# EAGLE board OpenBook_PCB_v56 (EAGLE 9.7.0)
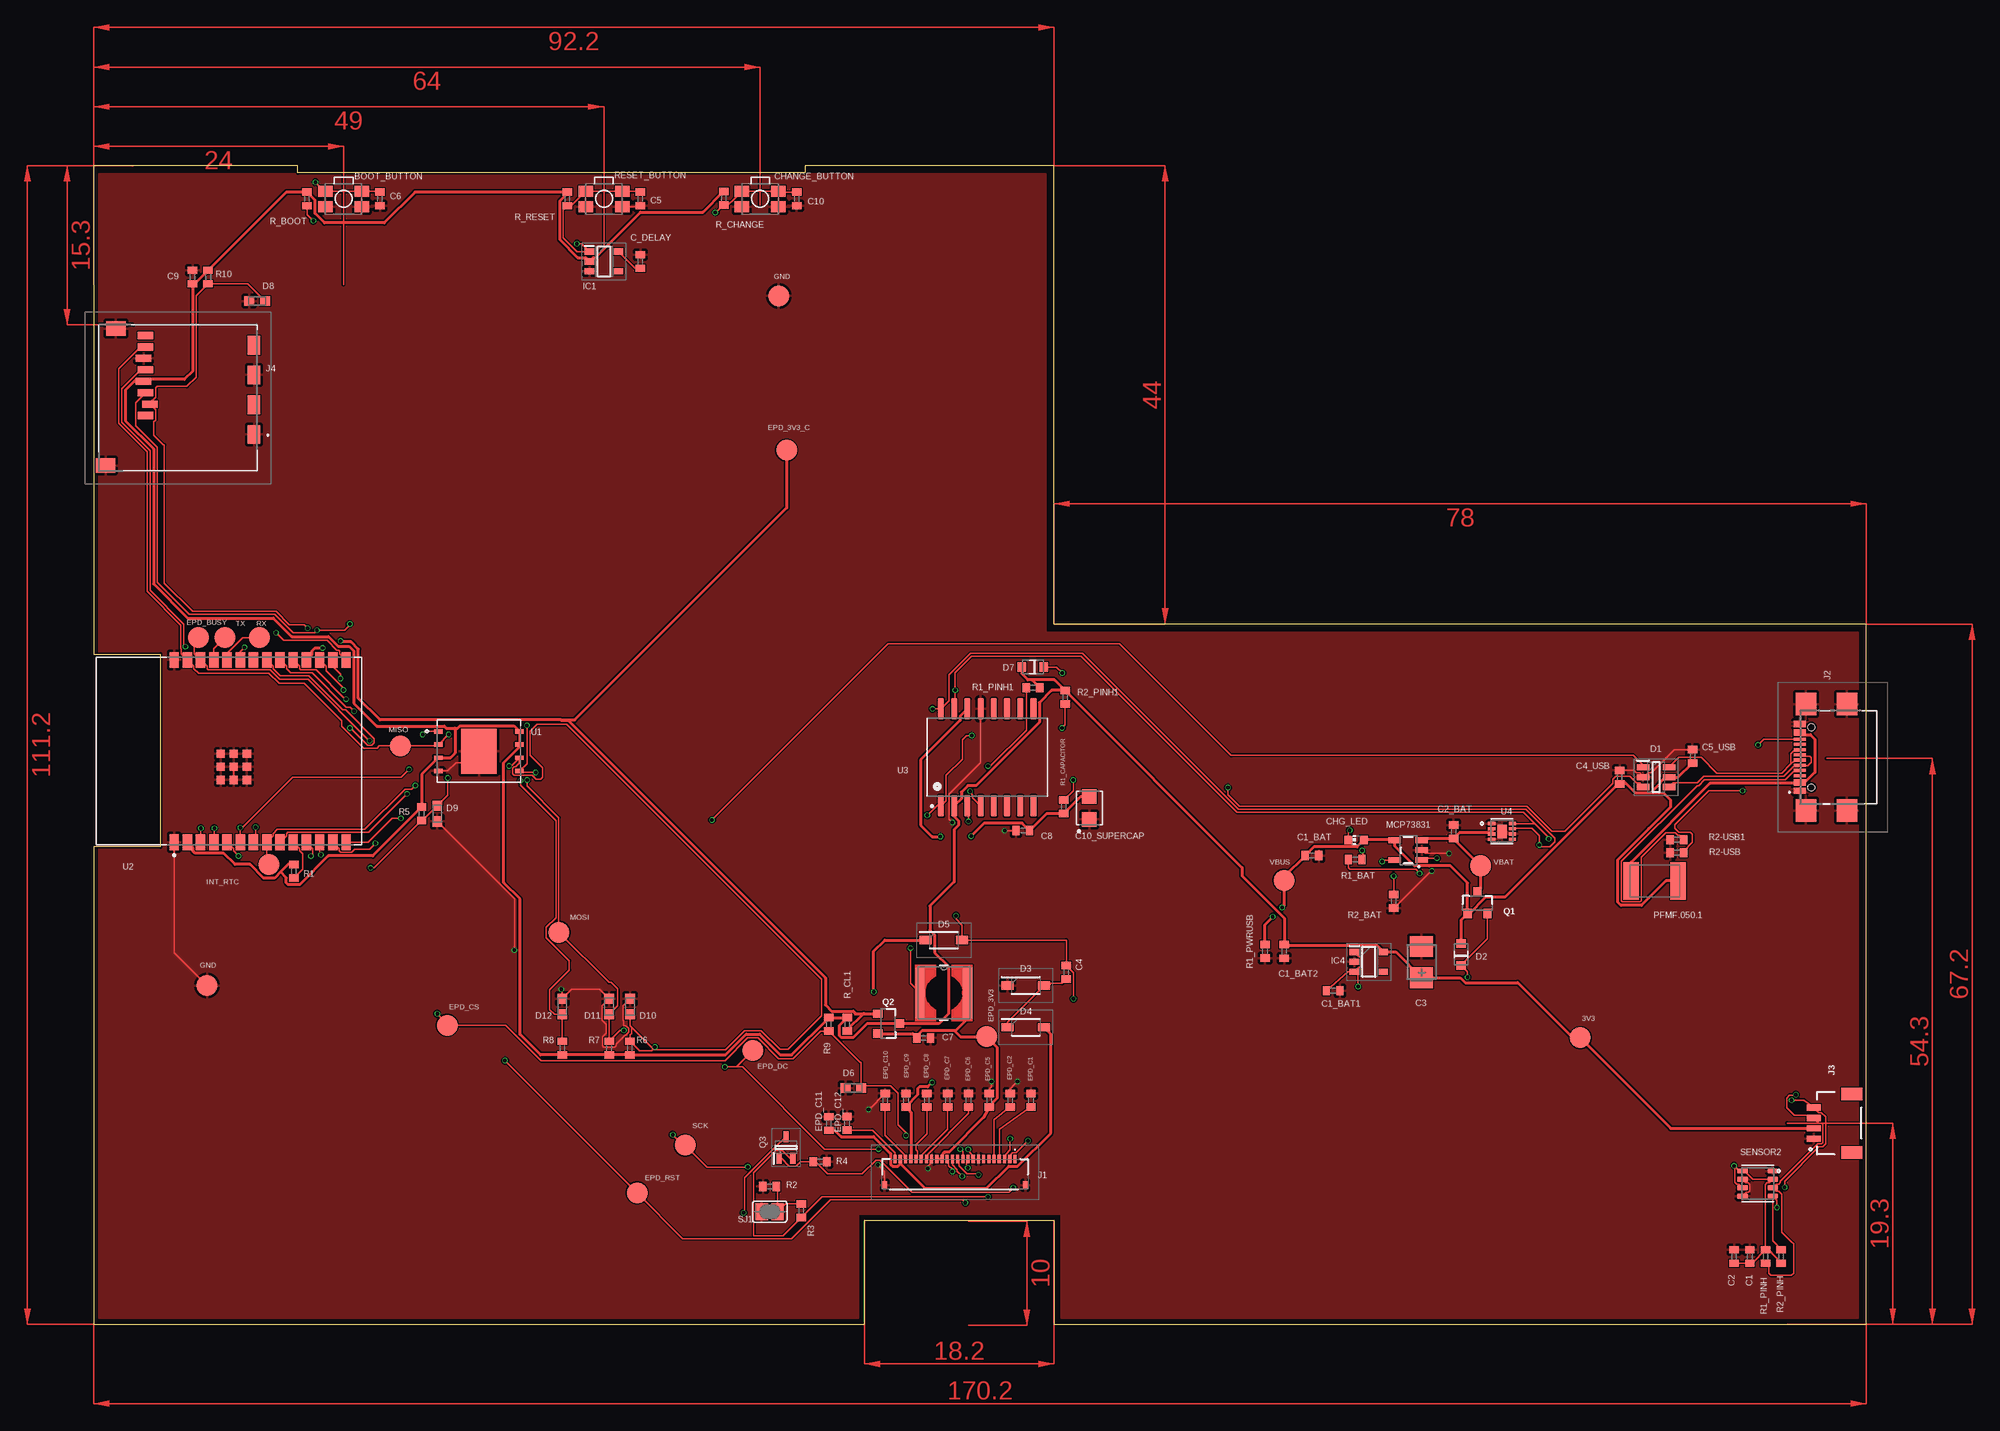
[diagram p0: board, top side]
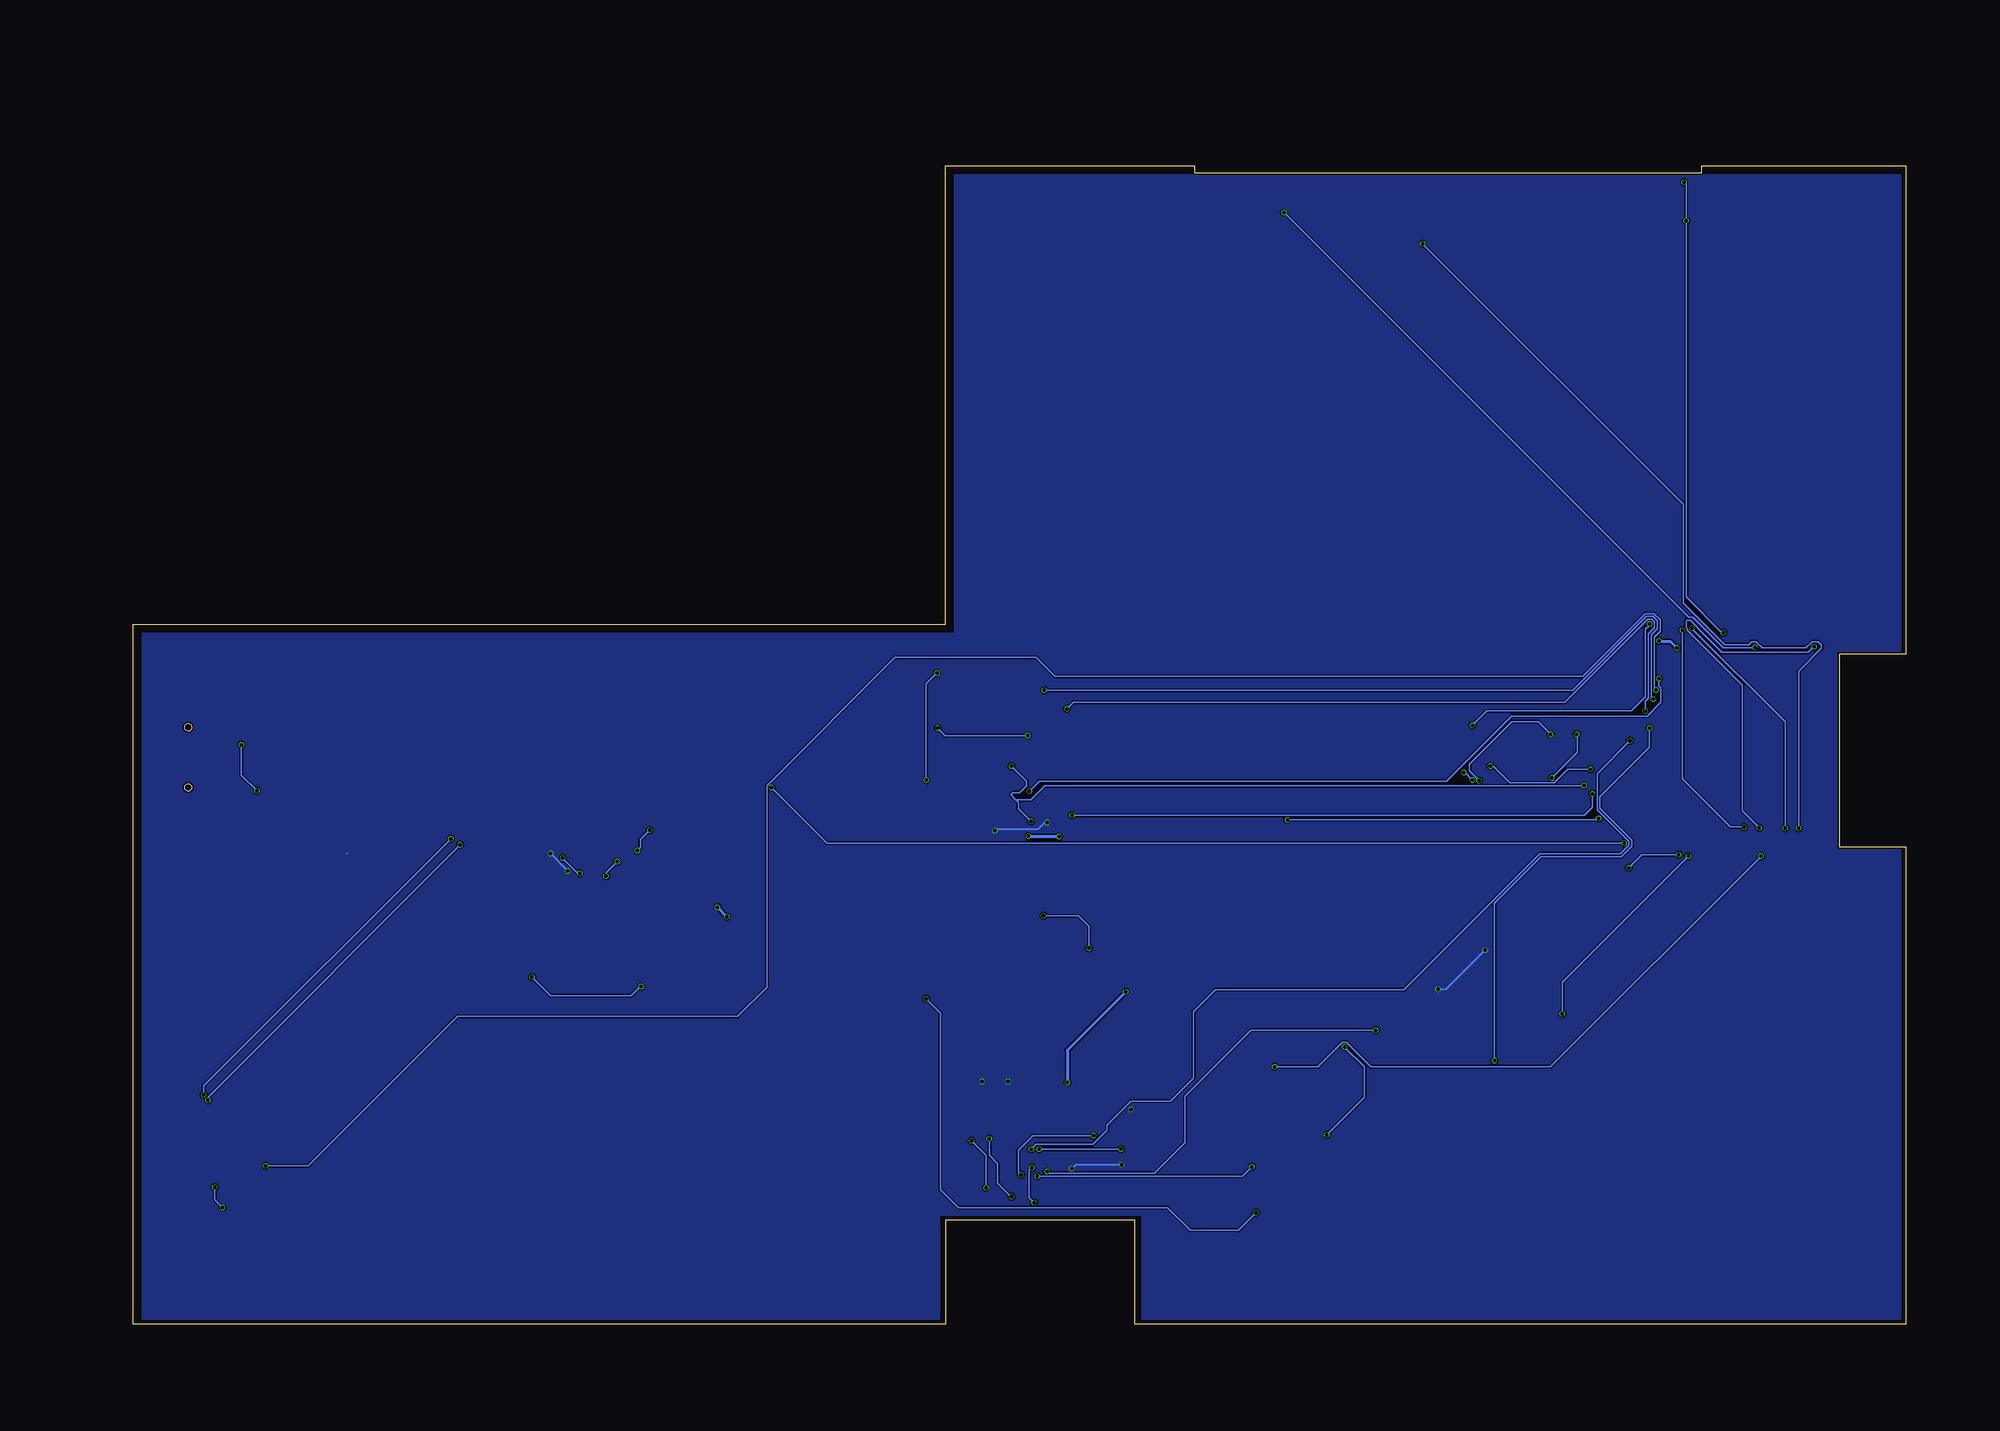
[diagram p1: board, bottom side, seen from below]

Size 170.2 x 111.2 mm. Coordinates in mm from the lower left corner, seen from the top.
Outline: 0,0 74,0 74,10 92.2,10 92.2,0 170.2,0 170.2,67.2 92.2,67.2 92.2,111.2 68.3,111.2 68.3,110.5 19.6,110.5 19.6,111.2 0,111.2 0,64.3 6.4,64.3 6.4,45.8 0,45.8 0,0
Copper layers (1*16): Top 0.035mm / dielectric 1.6mm / Bottom 0.035mm
Design rules "jlcpcb-2layers.dru *": minimum track width 5mil, minimum drill 0.3mm, track to track 5mil, track to pad 5mil, pad to pad 5mil, via to via 5mil, smd to smd 5mil, copper to edge 0.2mm, drill to drill 6mil, minimum pad ring 10mil, minimum via ring 3mil, stop-mask expansion 4mil, vias tented up to drill 0mil, thermal gap 10mil
Net classes: 0 default: width 0.15 mm; 1 power: width 0.3 mm

## Footprints (pad centres in the part's own frame; a part is rotated, then mirrored left to right if it is on the bottom)
MYBUTTON = smd 1.4 x 1.05: 1 1.75,0.75; 2 -1.75,0.75; 3 -1.75,-0.75; 4 1.75,-0.75
ESP32_WROVER_EAGLE-LTSPICE_C0402 = smd 0.7 x 0.9: 1 -0.65,0; 2 0.65,0
RCL_CT3528 = smd 2 x 2.2: + -1.5,0; - 1.5,0
CAPCP3225X100N = smd 1.4 x 1.4: 1 -1.1,0; 2 1.1,0
ADAFRUIT_CHIP-LED0603 = smd 0.8 x 0.8: A 0,-0.75; C 0,0.75
SOT95P280X145-6N = smd 1.2 x 0.6: 1 -1.25,0.95; 2 -1.25,0; 3 -1.25,-0.95; 4 1.25,-0.95; 5 1.25,0; 6 1.25,0.95
ESP32_WROVER_AVX---SD0805S020S1R0_AVX_SD0805S020S1R0_0 = smd 0.8 x 0.9: 1 -1.05,0; 2 1.05,0
SOD3716X135N = smd 1.15 x 0.8: 1 -1.75,0; 2 1.75,0
DIOC1608X36N = smd 0.97 x 0.94: 1 -0.75,0; 2 0.75,0
SOT95P280X125-5N = smd 0.9 x 0.6: 1 -1.4,0.95; 2 -1.4,0; 3 -1.4,-0.95; 4 1.4,-0.95; 5 1.4,0.95
SOT95P280X120-5N = smd 0.9 x 0.6: 1 -1.4,0.95; 2 -1.4,0; 3 -1.4,-0.95; 4 1.4,-0.95; 5 1.4,0.95
FH34SRJ24S05SH99 = smd 0.3 x 0.8: 1 5.75,1.45; 2 5.25,1.45; 3 4.75,1.45; 4 4.25,1.45; 5 3.75,1.45; 6 3.25,1.45; 7 2.75,1.45; 8 2.25,1.45; 9 1.75,1.45; 10 1.25,1.45; 11 0.75,1.45; 12 0.25,1.45; 13 -0.25,1.45; 14 -0.75,1.45; 15 -1.25,1.45; 16 -1.75,1.45; 17 -2.25,1.45; 18 -2.75,1.45; 19 -3.25,1.45; 20 -3.75,1.45; 21 -4.25,1.45; 22 -4.75,1.45; 23 -5.25,1.45; 24 -5.75,1.45 | smd 0.4 x 0.8: MP1 6.75,-1.05; MP2 -6.75,-1.05
SAMACSYS_PARTS_USB4110GFA = smd 0.3 x 1.15: A1 -3.35,3.678; A4 -2.55,3.678; A5 -1.25,3.678; A6 -0.25,3.678; A7 0.25,3.678; A8 1.25,3.678; A9 2.55,3.678; A12 3.35,3.678; B1 3.05,3.678; B4 2.25,3.678; B5 1.75,3.678; B6 0.75,3.678; B7 -0.75,3.678; B8 -1.75,3.678; B9 -2.25,3.678; B12 -3.05,3.678 | smd 2.18 x 2: MP1 -5.11,-0.827; MP2 5.11,-0.827; MP3 -5.11,3.103; MP4 5.11,3.103 | hole 0.65: -2.89,2.603; 2.89,2.603
JST04_1MM_RA = smd 0.6 x 1.35: 1 -1.5,0; 2 -0.5,0; 3 0.5,0; 4 1.5,0 | smd 1.2 x 2: NC1 2.8,-3.675; NC2 -2.8,-3.675
112ATAARR03ATTEND = smd 1.8 x 1.2: G1 10.6,10.4; G2 4.9,10.4; S1 7.75,10.4; S2 2.05,10.4 | smd 1.4 x 1.9: G3 13.6,-3.85; G4 0.45,-2.85 | smd 0.7 x 1.5: P1 8.8,0; P2 7.7,0.4; P3 6.6,0; P4 5.5,-0.2; P5 4.4,0; P6 3.3,-0.2; P7 2.2,0; P8 1.1,0
IND_4828-WE-TPC_WRE = smd 0.889 x 4.826: 1 -2.286,0; 2 2.286,0
ESP32_WROVER_SPARKFUN-IC-POWER_SOT23-5 = smd 0.55 x 1.2: 1 -0.95,-1.3; 2 0,-1.3; 3 0.95,-1.3; 4 0.95,1.3; 5 -0.95,1.3
ESP32C6_VARISTOR_CT/CN1812 = smd 1.5 x 3.6: 1 -2.25,0; 2 2.25,0
ESP32_WROVER_SPARKFUN-DISCRETESEMI_SOT23-3 = smd 0.8 x 0.9: 1 -0.95,-1; 2 0.95,-1; 3 0,1.1
SOT65P210X110-3N = smd 1.05 x 0.5: 1 -1.05,0.65; 2 -1.05,-0.65; 3 1.05,0
ESP32_WROVER_EAGLE-LTSPICE_R0402 = smd 0.7 x 0.9: 1 -0.65,0; 2 0.65,0
ESP32_WROVER_BME680_PSON80P300X300X100-8N = smd 1.016 x 0.5: 1 1.458,1.2; 2 1.458,0.4; 3 1.458,-0.4; 4 1.458,-1.2; 5 -1.458,-1.22; 6 -1.458,-0.4; 7 -1.458,0.4; 8 -1.458,1.2
SJ = smd 1.168 x 1.6: 1 -0.762,0; 2 0.762,0
TP20R = smd 2 x 2: TP 0,0
SON127P600X800X80-9N = smd 0.94 x 0.44: 1 -3.895,1.905; 2 -3.895,0.635; 3 -3.895,-0.635; 4 -3.895,-1.905; 5 3.895,-1.905; 6 3.895,-0.635; 7 3.895,0.635; 8 3.895,1.905 | smd 3.4 x 4.3: 9 0,0
XCVR_ESP32-C6-WROOM-1-N8 = smd 1.5 x 0.9: 1 -8.75,5.26; 2 -8.75,3.99; 3 -8.75,2.72; 4 -8.75,1.45; 5 -8.75,0.18; 6 -8.75,-1.09; 7 -8.75,-2.36; 8 -8.75,-3.63; 9 -8.75,-4.9; 10 -8.75,-6.17; 11 -8.75,-7.44; 12 -8.75,-8.71; 13 -8.75,-9.98; 14 -8.75,-11.25; 15 8.75,-11.25; 16 8.75,-9.98; 17 8.75,-8.71; 18 8.75,-7.44; 19 8.75,-6.17; 20 8.75,-4.9; 21 8.75,-3.63; 22 8.75,-2.36; 23 8.75,-1.09; 24 8.75,0.18; 25 8.75,1.45; 26 8.75,2.72; 27 8.75,3.99; 28 8.75,5.26 | smd 0.8 x 0.8: 29_1 -2.755,0.79; 29_2 -1.505,0.79; 29_3 -0.255,0.79; 29_4 -2.755,-0.46; 29_5 -1.505,-0.46; 29_6 -0.255,-0.46; 29_7 -2.755,-1.71; 29_8 -1.505,-1.71; 29_9 -0.255,-1.71
SOIC127P1032X265-16N = smd 2.05 x 0.59: 1 -4.655,4.445; 2 -4.655,3.175; 3 -4.655,1.905; 4 -4.655,0.635; 5 -4.655,-0.635; 6 -4.655,-1.905; 7 -4.655,-3.175; 8 -4.655,-4.445; 9 4.655,-4.445; 10 4.655,-3.175; 11 4.655,-1.905; 12 4.655,-0.635; 13 4.655,0.635; 14 4.655,1.905; 15 4.655,3.175; 16 4.655,4.445
SON50P200X200X80-9N = smd 0.76 x 0.27: 1 -0.985,0.75; 2 -0.985,0.25; 3 -0.985,-0.25; 4 -0.985,-0.75; 5 0.985,-0.75; 6 0.985,-0.25; 7 0.985,0.25; 8 0.985,0.75 | smd 0.9 x 1.3: 9 0,0

## Placement (x,y rotation side)
BOOT_BUTTON  BUTTON_CUSYOMV1  [MYBUTTON]  24,108 180 top
C1  100nF  [ESP32_WROVER_EAGLE-LTSPICE_C0402]  159,6.5 90 top
C1_BAT  4.7uF  [ESP32_WROVER_EAGLE-LTSPICE_C0402]  116.97,44.98 0 top
C1_BAT1  4.7uF  [ESP32_WROVER_EAGLE-LTSPICE_C0402]  119,32 0 top
C1_BAT2  4.7uF  [ESP32_WROVER_EAGLE-LTSPICE_C0402]  114.31,35.78 270 top
C2  100nF  [ESP32_WROVER_EAGLE-LTSPICE_C0402]  157.5,6.5 90 top
C2_BAT  4.7uF  [ESP32_WROVER_EAGLE-LTSPICE_C0402]  130.56,47.26 90 top
C3  100uF  [RCL_CT3528]  127.49,34.75 90 top
C4  4.7uF/25V  [ESP32_WROVER_EAGLE-LTSPICE_C0402]  93.38,33.78 90 top
C4_USB  100nF  [ESP32_WROVER_EAGLE-LTSPICE_C0402]  146.5,52.5 90 top
C5  1uF  [ESP32_WROVER_EAGLE-LTSPICE_C0402]  52.5,108 270 top
C5_USB  4.7uF  [ESP32_WROVER_EAGLE-LTSPICE_C0402]  153.5,54.5 90 top
C6  100nF  [ESP32_WROVER_EAGLE-LTSPICE_C0402]  27.5,108 270 top
C7  10uF  [ESP32_WROVER_EAGLE-LTSPICE_C0402]  79.69,27.48 0 top
C8  100nF  [ESP32_WROVER_EAGLE-LTSPICE_C0402]  89.21,47.37 180 top
C9  100nF  [ESP32_WROVER_EAGLE-LTSPICE_C0402]  9.5,100.5 90 top
C10  100nF  [ESP32_WROVER_EAGLE-LTSPICE_C0402]  67.5,108 270 top
C10_SUPERCAP  CPH3225A  [CAPCP3225X100N]  95.6,49.55 90 top
C_DELAY  100nF  [ESP32_WROVER_EAGLE-LTSPICE_C0402]  52.5,102 90 top
CHANGE_BUTTON  BUTTON_CUSYOMV1  [MYBUTTON]  64,108 180 top
CHG_LED  [ADAFRUIT_CHIP-LED0603]  121.21,46.48 90 top
D1  USBLC6-2SC6Y  [SOT95P280X145-6N]  150,52.5 0 top
D2  ESP32_WROVER_AVX---SD0805S020S1R0_AVX_SD0805S020S1R0_0_0AVX_SD0805S020S1R0_0_0  [ESP32_WROVER_AVX---SD0805S020S1R0_AVX_SD0805S020S1R0_0]  131.27,35.49 90 top
D3  MBR0530  [SOD3716X135N]  89.5,32.5 0 top
D4  MBR0530  [SOD3716X135N]  89.5,28.5 0 top
D5  MBR0530  [SOD3716X135N]  81.64,36.86 0 top
D6  PGB1010603MR  [DIOC1608X36N]  72.93,22.66 0 top
D7  SD0805S020S1R0  [ESP32_WROVER_AVX---SD0805S020S1R0_AVX_SD0805S020S1R0_0]  90.17,63.07 180 top
D8  PGB1010603MR  [DIOC1608X36N]  15.71,98.19 0 top
D9  PGB1010603MR  [DIOC1608X36N]  33,49 90 top
D10  PGB1010603MR  [DIOC1608X36N]  51.5,30.5 270 top
D11  PGB1010603MR  [DIOC1608X36N]  49.5,30.5 270 top
D12  PGB1010603MR  [DIOC1608X36N]  45,30.5 270 top
EPD_C1  1uF/50V  [ESP32_WROVER_EAGLE-LTSPICE_C0402]  90,21.5 90 top
EPD_C2  1uF/50V  [ESP32_WROVER_EAGLE-LTSPICE_C0402]  88,21.5 90 top
EPD_C5  0.1uF/50V  [ESP32_WROVER_EAGLE-LTSPICE_C0402]  86,21.5 90 top
EPD_C6  1uF/50V  [ESP32_WROVER_EAGLE-LTSPICE_C0402]  84,21.5 90 top
EPD_C7  1uF/50V  [ESP32_WROVER_EAGLE-LTSPICE_C0402]  82,21.5 90 top
EPD_C8  1uF/50V  [ESP32_WROVER_EAGLE-LTSPICE_C0402]  80,21.5 90 top
EPD_C9  1uF/50V  [ESP32_WROVER_EAGLE-LTSPICE_C0402]  78,21.5 90 top
EPD_C10  1uF/50V  [ESP32_WROVER_EAGLE-LTSPICE_C0402]  76,21.5 90 top
EPD_C11  1uF/50V  [ESP32_WROVER_EAGLE-LTSPICE_C0402]  70.58,19.26 90 top
EPD_C12  1uF/50V  [ESP32_WROVER_EAGLE-LTSPICE_C0402]  72.33,19.28 90 top
IC1  BD5229G-TR  [SOT95P280X125-5N]  49,102 0 top
IC4  XC6220A331MR-G  [SOT95P280X120-5N]  122.43,34.78 0 top
J1  FH34SRJ-24S-0.5SH_99_  [FH34SRJ24S05SH99]  82.7,14.39 0 top
J2  SAMACSYS_PARTS_USB4110-GF-A  [SAMACSYS_PARTS_USB4110GFA]  167.5,54.4 90 top
J3  QWIIC_RIGHT_ANGLE  [JST04_1MM_RA]  165.12,19.3 90 top
J4  112A-TAAR-R03_ATTEND  [112ATAARR03ATTEND]  5,96 270 top
L1  68uH  [IND_4828-WE-TPC_WRE]  81.63,31.8 0 top
MCP73831  ESP32_WROVER_SPARKFUN-IC-POWER_MCP73831  [ESP32_WROVER_SPARKFUN-IC-POWER_SOT23-5]  126.22,45.5 90 top
PFMF.050.1  ESP32C6_VARISTORCN1812  [ESP32C6_VARISTOR_CT/CN1812]  149.87,42.54 0 top
Q1  20V/4.2A/52mΩ/1.4W  [ESP32_WROVER_SPARKFUN-DISCRETESEMI_SOT23-3]  132.85,40.41 0 top
Q2  20V/4.2A/52mΩ/1.4W  [ESP32_WROVER_SPARKFUN-DISCRETESEMI_SOT23-3]  76.27,28.85 270 top
Q3  SI1308EDL-T1-GE3  [SOT65P210X110-3N]  66.47,16.96 90 top
R1  10K  [ESP32_WROVER_EAGLE-LTSPICE_R0402]  19.23,43.47 270 top
R1_BAT  200  [ESP32_WROVER_EAGLE-LTSPICE_R0402]  121.12,44.59 0 top
R1_CAPACITOR  15  [ESP32_WROVER_EAGLE-LTSPICE_R0402]  93.15,49.67 270 top
R1_PINH  10K  [ESP32_WROVER_EAGLE-LTSPICE_R0402]  160.5,6.5 90 top
R1_PINH1  10K  [ESP32_WROVER_EAGLE-LTSPICE_R0402]  90.19,61.08 0 top
R1_PWRUSB  100K  [ESP32_WROVER_EAGLE-LTSPICE_R0402]  112.46,35.79 90 top
R2  2.2  [ESP32_WROVER_EAGLE-LTSPICE_R0402]  64.9,13.22 0 top
R2-USB  5k1  [ESP32_WROVER_EAGLE-LTSPICE_R0402]  152,45.25 180 top
R2-USB1  5k1  [ESP32_WROVER_EAGLE-LTSPICE_R0402]  152,46.5 0 top
R2_BAT  2K  [ESP32_WROVER_EAGLE-LTSPICE_R0402]  124.81,40.59 90 top
R2_PINH  10K  [ESP32_WROVER_EAGLE-LTSPICE_R0402]  162,6.5 270 top
R2_PINH1  10K  [ESP32_WROVER_EAGLE-LTSPICE_R0402]  93.27,60.17 90 top
R3  0.47  [ESP32_WROVER_EAGLE-LTSPICE_R0402]  67.93,10.89 90 top
R4  10K  [ESP32_WROVER_EAGLE-LTSPICE_R0402]  69.74,15.59 0 top
R5  10K  [ESP32_WROVER_EAGLE-LTSPICE_R0402]  31.5,49 90 top
R6  10K  [ESP32_WROVER_EAGLE-LTSPICE_R0402]  51.5,26.5 270 top
R7  10K  [ESP32_WROVER_EAGLE-LTSPICE_R0402]  49.5,26.5 270 top
R8  10K  [ESP32_WROVER_EAGLE-LTSPICE_R0402]  45,26.5 270 top
R9  10K  [ESP32_WROVER_EAGLE-LTSPICE_R0402]  70.59,28.78 90 top
R10  10K  [ESP32_WROVER_EAGLE-LTSPICE_R0402]  11,100.5 90 top
R_BOOT  10K  [ESP32_WROVER_EAGLE-LTSPICE_R0402]  20.5,108 270 top
R_CHANGE  10K  [ESP32_WROVER_EAGLE-LTSPICE_R0402]  60.5,108.07 270 top
R_CL1  10K  [ESP32_WROVER_EAGLE-LTSPICE_R0402]  72.35,28.78 270 top
R_RESET  10K  [ESP32_WROVER_EAGLE-LTSPICE_R0402]  45.5,108 270 top
RESET_BUTTON  BUTTON_CUSYOMV1  [MYBUTTON]  49,108 180 top
SENSOR2  BME688  [ESP32_WROVER_BME680_PSON80P300X300X100-8N]  159.75,13.5 0 top
SJ1  [SJ]  64.91,10.8 0 top
TP1  TPTP20R  [TP20R]  12.61,65.9 0 top
TP2  TPTP20R  [TP20R]  15.93,65.9 0 top
TP3  TPTP20R  [TP20R]  133.15,44 0 top
TP4  TPTP20R  [TP20R]  65.77,98.7 0 top
TP5  TPTP20R  [TP20R]  10.89,32.5 0 top
TP6  TPTP20R  [TP20R]  29.45,55.5 0 top
TP7  TPTP20R  [TP20R]  44.67,37.6 0 top
TP8  TPTP20R  [TP20R]  56.8,17.18 0 top
TP9  TPTP20R  [TP20R]  10.09,65.9 0 top
TP10  TPTP20R  [TP20R]  33.95,28.68 0 top
TP11  TPTP20R  [TP20R]  63.3,26.28 0 top
TP12  TPTP20R  [TP20R]  52.19,12.6 0 top
TP13  TPTP20R  [TP20R]  66.54,83.9 0 top
TP14  TPTP20R  [TP20R]  114.29,42.6 0 top
TP15  TPTP20R  [TP20R]  16.84,44.1 0 top
TP16  TPTP20R  [TP20R]  142.71,27.5 0 top
TP17  TPTP20R  [TP20R]  85.73,27.6 0 top
U1  W25Q512JVEIQ  [SON127P600X800X80-9N]  37,55 0 top
U2  ESP32-C6-WROOM-1-N8  [XCVR_ESP32-C6-WROOM-1-N8]  13,55 90 top
U3  DS3231SN#  [SOIC127P1032X265-16N]  85.79,54.4 90 top
U4  MAX17048G+T10  [SON50P200X200X80-9N]  135.21,47.3 0 top

## Library data of the parts
BOOT_BUTTON CHANGE_BUTTON CHG_LED PFMF.050.1 RESET_BUTTON SJ1 TP1-TP17 = DeskAssistant_v19_v1
C1 C1_BAT C1_BAT1 C1_BAT2 C2 C2_BAT C4 C4_USB C5 C5_USB C6-C10 C_DELAY EPD_C1 EPD_C2 EPD_C5-EPD_C12 = DeskAssistant_v19_v1; SPICEMODEL: NONE; SPICEPREFIX: C
C3 = DeskAssistant_v19_v1; SPICEPREFIX: C; TYPE: TANT
C10_SUPERCAP = DeskAssistant_v19_v1; AVAILABILITY: Not in stock; CHECK_PRICES: https://www.snapeda.com/parts/CPH3225A/Seiko+Instruments/view-part/?ref=eda; DESCRIPTION: 11 mF (EDLC) Supercapacitor 3.3 V 1210 (3225 Metric) - -; MF: Seiko Instruments; MP: CPH3225A; PACKAGE: 1210 Seiko; PRICE: None; PURCHASE-URL: https://www.snapeda.com/api/url_track_click_mouser/?unipart_id=562593&manufacturer=Seiko Instruments&part_name=CPH3225A&search_term=None; SNAPEDA_LINK: https://www.snapeda.com/parts/CPH3225A/Seiko+Instruments/view-part/?ref=snap
D1 = DeskAssistant_v19_v1; AVAILABILITY: In Stock; CHECK_PRICES: https://www.snapeda.com/parts/USBLC6-2SC6Y/STMicroelectronics/view-part/?ref=eda; DESCRIPTION: 17V Clamp 5A (8/20µs) Ipp Tvs Diode Surface Mount SOT-23-6; MF: STMicroelectronics; MP: USBLC6-2SC6Y; PACKAGE: SOT-23-6 STMicroelectronics; PRICE: None; SNAPEDA_LINK: https://www.snapeda.com/parts/USBLC6-2SC6Y/STMicroelectronics/view-part/?ref=snap
D2 D7 = DeskAssistant_v19_v1; CENTROID_NOT_SPECIFIED: No; DATASHEET: http://datasheets.avx.com/schottky.pdf; DIGIKEY_DESCRIPTION: DIODE SCHOTTKY 20V 1A 0805; DIGIKEY_PART_NUMBER: 478-7800-1-ND; LEAD_FREE: yes; MF: AVX; MOUSER_PART_NUMBER: 581-SD0805S020S1R0; PACKAGE: 0805 (2012 metric); PREFIX: D; ROHS: yes; TEMPERATURE_RANGE_HIGH: +125°C; TEMPERATURE_RANGE_LOW: -55°C; VALUE_TXT: SD0805S020S1R0
D3-D5 = DeskAssistant_v19_v1; AVAILABILITY: In Stock; CHECK_PRICES: https://www.snapeda.com/parts/MBR0530/Onsemi/view-part/?ref=eda; DESCRIPTION: Diode Schottky 30 V 500mA Surface Mount SOD-123; MF: ON Semiconductor; MP: MBR0530; PACKAGE: SOD-123-2 ON Semiconductor; PRICE: None; PURCHASE-URL: https://www.snapeda.com/api/url_track_click_mouser/?unipart_id=179458&manufacturer=ON Semiconductor&part_name=MBR0530&search_term=None; SNAPEDA_LINK: https://www.snapeda.com/parts/MBR0530/Onsemi/view-part/?ref=snap
D6 D8-D12 = DeskAssistant_v19_v1; AVAILABILITY: In Stock; CHECK_PRICES: https://www.snapeda.com/parts/PGB1010603MR/Littelfuse/view-part/?ref=eda; DESCRIPTION: 150V (Typ) Clamp - Ipp Tvs Diode Surface Mount 0603 (1608 Metric); MF: Littelfuse Inc.; MP: PGB1010603MR; PACKAGE: 0603 Littelfuse Inc.; PRICE: None; PURCHASE-URL: https://www.snapeda.com/api/url_track_click_mouser/?unipart_id=5659453&manufacturer=Littelfuse Inc.&part_name=PGB1010603MR&search_term=None; SNAPEDA_LINK: https://www.snapeda.com/parts/PGB1010603MR/Littelfuse/view-part/?ref=snap
IC1 = DeskAssistant_v19_v1; DESCRIPTION: Voltage Detector with Adjustable Delay Time: CMOS processes are utilized to develop high precision, low current consumption CMOS reset ICs that allow arbitrary setting of the delay time. The extensive lineup includes both Nch Open Drain and CMOS output types in a wide range of detection voltages (from 2.3V to 6.0V, in 0.1V steps), enabling selection of the ideal solution based on customer requirements. In addition, the entire series is of course both lead-free and RoHS-compliant.; HEIGHT: 1.25mm; MANUFACTURER_NAME: ROHM Semiconductor; MANUFACTURER_PART_NUMBER: BD5229G-TR; MOUSER_PART_NUMBER: 755-BD5229G-TR; MOUSER_PRICE-STOCK: https://www.mouser.co.uk/ProductDetail/ROHM-Semiconductor/BD5229G-TR?qs=4kLU8WoGk0vvnhrrYwdszw%3D%3D
IC4 = DeskAssistant_v19_v1; DESCRIPTION: LDO Voltage Regulators; HEIGHT: 1.2mm; MANUFACTURER_NAME: Torex; MANUFACTURER_PART_NUMBER: XC6220A331MR-G; MOUSER_PART_NUMBER: 865-XC6220A331MR-G; MOUSER_PRICE-STOCK: https://www.mouser.co.uk/ProductDetail/Torex-Semiconductor/XC6220A331MR-G?qs=AsjdqWjXhJ8ZSWznL1J0gg%3D%3D
J1 = DeskAssistant_v19_v1; DESCRIPTION: 24 Position FFC, FPC Connector Contacts, Top and Bottom 0.020" (0.50mm) Surface Mount, Right Angle; HEIGHT: 1.1mm; MANUFACTURER_NAME: Hirose; MANUFACTURER_PART_NUMBER: FH34SRJ-24S-0.5SH(99); MOUSER_PART_NUMBER: 798-FH34SRJ24S05SH99; MOUSER_PRICE-STOCK: https://www.mouser.co.uk/ProductDetail/Hirose-Connector/FH34SRJ-24S-0.5SH99?qs=vcbW%252B4%252BSTIpKBl5ap9J8Fw%3D%3D
J2 = DeskAssistant_v19_v1; DESCRIPTION: CONN USB 2.0 TYPE-C R/A SMT; HEIGHT: 3.26mm; MANUFACTURER_NAME: GCT (GLOBAL CONNECTOR TECHNOLOGY); MANUFACTURER_PART_NUMBER: USB4110-GF-A; MOUSER_PART_NUMBER: 640-USB4110-GF-A; MOUSER_PRICE-STOCK: https://www.mouser.co.uk/ProductDetail/GCT/USB4110-GF-A?qs=KUoIvG%2F9IlYiZvIXQjyJeA%3D%3D
J3 = DeskAssistant_v19_v1; PROD_ID: CONN-13694
J4 = DeskAssistant_v19_v1; DESCRIPTION: Micro SD Card Socket, Push-Push Type, Top Mount, SMT, H=1.83mm, 10u; HEIGHT: 1.9mm; MANUFACTURER_NAME: ATTEND; MANUFACTURER_PART_NUMBER: 112A-TAAR-R03 ATTEND
L1 = DeskAssistant_v19_v1; COPYRIGHT: Copyright (C) 2024 Ultra Librarian. All rights reserved.; MANUFACTURER_PART_NUMBER: 744043680; MFR_NAME: Wurth Electronics
MCP73831 = DeskAssistant_v19_v1; PROD_ID: IC-09995
Q1 Q2 = DeskAssistant_v19_v1; PROD_ID: TRAN-14388; P_CHANNEL: DMG2305UX-7
Q3 = DeskAssistant_v19_v1; AVAILABILITY: In Stock; CHECK_PRICES: https://www.snapeda.com/parts/SI1308EDL-T1-GE3/Vishay+Siliconix/view-part/?ref=eda; DESCRIPTION: Si1308EDL-T1-GE3 N-channel MOSFET Transistor, 1.5 A, 30 V, 3-Pin SC-70 | Siliconix / Vishay SI1308EDL-T1-GE3; MF: Vishay Siliconix; MP: SI1308EDL-T1-GE3; PACKAGE: SOT-323 Vishay Semiconductor; PRICE: None; PURCHASE-URL: https://www.snapeda.com/api/url_track_click_mouser/?unipart_id=274603&manufacturer=Vishay Siliconix&part_name=SI1308EDL-T1-GE3&search_term=None; SNAPEDA_LINK: https://www.snapeda.com/parts/SI1308EDL-T1-GE3/Vishay+Siliconix/view-part/?ref=snap
R1 R1_BAT R1_CAPACITOR R1_PINH R1_PINH1 R1_PWRUSB R2 R2-USB R2-USB1 R2_BAT R2_PINH R2_PINH1 R3-R10 R_BOOT R_CHANGE R_CL1 R_RESET = DeskAssistant_v19_v1; SPICEMODEL: NONE; SPICEPREFIX: R
SENSOR2 = DeskAssistant_v19_v1; AVAILABILITY: Unavailable; DESCRIPTION: Integrated Environmental Unit; MF: Bosch Sensortec; MP: BME680; PACKAGE: LGA-8 Bosch Tools; PRICE: None
U1 = DeskAssistant_v19_v1; AVAILABILITY: In Stock; CHECK_PRICES: https://www.snapeda.com/parts/W25Q512JVEIQ/Winbond+Electronics/view-part/?ref=eda; DESCRIPTION: FLASH - NOR Memory IC 512Mb (64M x 8) SPI - Quad I/O 133 MHz 8-WSON (8x6); MF: Winbond Electronics; MP: W25Q512JVEIQ; PACKAGE: Package; PRICE: None; SNAPEDA_LINK: https://www.snapeda.com/parts/W25Q512JVEIQ/Winbond+Electronics/view-part/?ref=snap
U2 = DeskAssistant_v19_v1; AVAILABILITY: In Stock; CHECK_PRICES: https://www.snapeda.com/parts/ESP32-C6-WROOM-1-N8/Espressif+Systems/view-part/?ref=eda; DESCRIPTION: Multiprotocol Modules ESP32-C6 module, Wi-Fi 6 in 2.4 GHz band, Bluetooth 5, Zigbee 3.0 and Thread. ESP34-WROOM Compatible - ENGINEERING SAMPLE; MF: Espressif Systems; MP: ESP32-C6-WROOM-1-N8; PACKAGE: None; PRICE: None; SNAPEDA_LINK: https://www.snapeda.com/parts/ESP32-C6-WROOM-1-N8/Espressif+Systems/view-part/?ref=snap
U3 = DeskAssistant_v19_v1; AVAILABILITY: In Stock; CHECK_PRICES: https://www.snapeda.com/parts/DS3231SN%23/Analog+Devices/view-part/?ref=eda; DESCRIPTION: Extremely Accurate I²C-Integrated RTC/TCXO/Crystal; MF: Analog Devices; MP: DS3231SN#; PACKAGE: SOIC-16 Maxim; PRICE: None; PURCHASE-URL: https://www.snapeda.com/api/url_track_click_mouser/?unipart_id=99048&manufacturer=Analog Devices&part_name=DS3231SN#&search_term=None; SNAPEDA_LINK: https://www.snapeda.com/parts/DS3231SN%23/Analog+Devices/view-part/?ref=snap
U4 = DeskAssistant_v19_v1; AVAILABILITY: In Stock; CHECK_PRICES: https://www.snapeda.com/parts/MAX17048G+T10/Analog+Devices/view-part/?ref=eda; DESCRIPTION: 3µA 1-Cell/2-Cell Fuel Gauge with ModelGauge; MF: Analog Devices; MP: MAX17048G+T10; PACKAGE: TDFN-8 Maxim; PRICE: None; PURCHASE-URL: https://www.snapeda.com/api/url_track_click_mouser/?unipart_id=329239&manufacturer=Analog Devices&part_name=MAX17048G+T10&search_term=None; SNAPEDA_LINK: https://www.snapeda.com/parts/MAX17048G+T10/Analog+Devices/view-part/?ref=snap

## Nets
3V3 [power]: C1_BAT2.1 C3.+ C9.1 D7.2 IC1.2 IC4.5 J3.2 J4.P4 Q2.3 R1.1 R1_PINH1.2 R2_PINH1.2 R5.2 R6.2 R7.2 R8.2 R9.2 R10.2 R_BOOT.1 R_CHANGE.1 R_CL1.1 R_RESET.1 TP16.TP U1.3 U1.7 U1.8 U2.2 U3.2
32KHZ: R2_PINH1.1 U2.9 U3.1
DN: D1.4 J2.A7 J2.B7
DP: D1.6 J2.A6 J2.B6
EPD_3V3 [power]: C7.1 EPD_C5.1 J1.15 J1.16 L1.2 Q2.2 TP17.TP
EPD_3V3_C [power]: Q2.1 R_CL1.2 TP13.TP U2.18
EPD_BUSY: J1.9 TP9.TP U2.26
EPD_CS: D6.2 J1.12 R9.1 TP10.TP U2.11
EPD_DC: J1.11 TP11.TP U2.5
EPD_RST: J1.10 TP12.TP U2.21
FLASH_CS: D9.2 R5.1 U1.1 U2.12
GDR: J1.2 Q3.1 R4.1
GND: BOOT_BUTTON.1 BOOT_BUTTON.2 C1.2 C1_BAT1.2 C1_BAT2.2 C1_BAT.2 C2.2 C2_BAT.2 C3.- C4_USB.2 C5.2 C5_USB.2 C6.2 C7.2 C8.2 C9.2 C10.2 C10_SUPERCAP.1 C_DELAY.2 CHANGE_BUTTON.1 CHANGE_BUTTON.2 D1.2 D3.1 D6.1 D8.1 D9.1 D10.1 D11.1 D12.1 EPD_C1.2 EPD_C2.2 EPD_C5.2 EPD_C6.2 EPD_C7.2 EPD_C8.2 EPD_C9.2 EPD_C10.2 EPD_C11.2 EPD_C12.2 IC1.3 IC4.2 J1.8 J1.17 J1.MP1 J1.MP2 J2.A1 J2.A12 J2.B1 J2.B12 J2.MP1 J2.MP2 J2.MP3 J2.MP4 J3.1 J4.G1 J4.G2 J4.G3 J4.G4 J4.P6 MCP73831.2 R1_PWRUSB.1 R2-USB1.1 R2-USB.2 R2.1 R2_BAT.1 R4.2 RESET_BUTTON.1 RESET_BUTTON.2 SENSOR2.1 SENSOR2.5 SENSOR2.7 SJ1.1 TP4.TP TP5.TP U1.4 U1.9 U2.1 U2.28 U2.29_1 U2.29_2 U2.29_3 U2.29_4 U2.29_5 U2.29_6 U2.29_7 U2.29_8 U2.29_9 U3.13 U4.1 U4.4 U4.6 U4.9
GPIO8: R1.2 U2.10
I2C_PW: C1.1 C2.1 R1_PINH.2 R2_PINH.2 SENSOR2.2 SENSOR2.6 SENSOR2.8 U2.17
INT_RTC: R1_PINH1.1 TP15.TP U2.8 U3.3
IO/BOOT: BOOT_BUTTON.3 BOOT_BUTTON.4 C6.1 R_BOOT.2 U2.15
IO/CHANGE: C10.1 CHANGE_BUTTON.3 CHANGE_BUTTON.4 R_CHANGE.2 U2.23
MISO: D12.2 J4.P7 R8.1 TP6.TP U1.2 U2.27
MOSI: D11.2 J1.14 J4.P3 R7.1 TP7.TP U1.5 U2.7
N$1: J2.A5 R2-USB1.2
N$2: J2.B5 R2-USB.1
N$3: C1_BAT1.1 D2.1 IC4.1 IC4.3 Q1.2
N$4: EPD_C12.1 J1.24
N$5: CHG_LED.C R1_BAT.2
N$6: MCP73831.1 R1_BAT.1
N$8: MCP73831.5 R2_BAT.2
N$9: C4.1 D3.2 D4.1
N$10: EPD_C10.1 J1.22
N$12: EPD_C8.1 J1.20
N$13: EPD_C7.1 J1.19
N$14: EPD_C6.1 J1.18
N$16: C_DELAY.1 IC1.5
N$17: D7.1 R1_CAPACITOR.1
N$22: EPD_C2.1 J1.5
N$23: EPD_C1.1 J1.4
PREVGH [power]: D5.1 EPD_C9.1 J1.21
PREVGL [power]: D4.2 EPD_C11.1 J1.23
RESE: J1.3 Q3.2 R3.1
RESE': R2.2 R3.2 SJ1.2
RESET: C5.1 IC1.1 R_RESET.2 RESET_BUTTON.3 RESET_BUTTON.4 U2.3
RTC_RST: U2.16 U3.4
RX: TP2.TP U2.24
SCK: D10.2 J1.13 J4.P5 R6.1 TP8.TP U1.6 U2.6
SCL: J3.4 R2_PINH.1 SENSOR2.4 U2.20 U3.16 U4.7
SDA: J3.3 R1_PINH.1 SENSOR2.3 U2.19 U3.15 U4.8
SRC: C4.2 D5.2 L1.1 Q3.3
SS_SD: D8.2 J4.P2 R10.1 U2.4
TX: TP1.TP U2.25
USB_D+: D1.1 U2.14
USB_D-: D1.3 U2.13
VBAT: C2_BAT.1 MCP73831.3 Q1.3 TP3.TP U4.2 U4.3
VBUS [power]: C1_BAT.1 C4_USB.1 C5_USB.1 CHG_LED.A D1.5 D2.2 MCP73831.4 PFMF.050.1.2 Q1.1 R1_PWRUSB.2 TP14.TP
VRTC [power]: C8.1 C10_SUPERCAP.2 R1_CAPACITOR.2 U3.14
VUSB [power]: J2.A4 J2.A9 J2.B4 J2.B9 PFMF.050.1.1

## Tracks (layer width: path | path; a pad name or v marks a point on that pad's centre or on a via)
3V3
  Top 0.3: R_CHANGE.1 58.5,106.72 52.52,106.72 48.16,102.37 47.97,102.37 IC1.2 47.23,102.37 46.48,102.37 44.75,104.1 44.75,107.79 45.5,108.54 R_RESET.1 30.85,108.65 27.9,105.7 22.18,105.7 21.27,106.61 21.27,107.88 R_BOOT.1 18.5,108.65 R10.2 9.7,99.85 C9.1 9.5,91.45 8.72,90.67 4.08,90.67 3.91,90.5 | R2_PINH1.2 92.25,61.84 90.08,61.84 | J3.2 151.41,18.8 TP16.TP 142.4,27.19 142.4,27.1 136.73,32.77 131.68,32.77 131.2,33.25 C3.+ 125.01,35.73 IC4.5 123.25,36.31 114.43,36.31 C1_BAT2.1 114.31,38.97 110.26,43.02 110.26,43.83 R2_PINH1.2 | 90.08,61.84 89.7,61.84 89.12,62.43 D7.2 | R1_PINH1.2 90.08,61.84 | R2_PINH1.2 91.97,60.82 90.81,59.66 90.81,57.76 84.73,51.68 83.93,51.68 83.31,51.06 83.31,50.44 U3.2 82.61,48.73 83.03,48.32 83.03,47.88 82.61,47.47 82.61,42.45 80.3,40.14 80.3,37.82 80.74,37.38 80.74,35.66 82.07,34.33 82.07,29.77 81.14,28.85 Q2.3 74.26,28.85 72.92,27.5 71.78,27.5 71.62,27.66 71.62,28.7 R_CL1.1 R9.2 67.01,25.85 65.93,25.85 63.94,27.83 62.66,27.83 60.67,25.85 R6.2 R7.2 R8.2 42.9,25.85 40.93,27.82 40.93,40.82 39.37,42.38 39.37,53.89 40.9,55.41 U1.7 U1.8 40.37,57.43 35.19,57.43 34.96,57.2 34.7,57.2 | 34.7,57.2 34.7,54.8 34.27,54.37 U1.3 31.5,52.76 R5.2 26.8,44.95 22.55,44.95 19.8,42.19 18.66,42.19 18.5,42.35 18.5,42.84 17.95,43.4 | U2.2 9.55,45.71 9.55,45.38 9.71,45.22 12.48,45.22 13.58,44.12 15.01,44.12 16.31,42.82 17.37,42.82 17.95,43.4 | R1.1 18.67,44.12 17.95,43.4 | 34.7,57.2 33.86,57.2 33.66,57.4 27.19,57.4 24.98,59.62 24.98,64.61 24.54,65.05 23.5,65.05 22.56,66 19.04,66 17.26,67.78 9.04,67.78 5.77,71.04 5.77,84 3.05,86.72 3.05,89.64 3.2,89.79 3.91,90.5
  Top 0.3: 3.91,90.5 J4.P4
32KHZ  (via drill 0.35)
  Top 0.15: 81.4,49.8 81.84,50.24 81.84,52.67 83.4,54.23 83.4,56.1 83.8,56.5 v84.3,56.5 | 81.4,49.8 U3.1 | v80.05,48.84 81,49.8 81.4,49.8 | R2_PINH1.1 93.27,57.52 v92.97,57.22 | U2.9 18.52,46.87 18.52,47.08 18.64,47.2 26.4,47.2 v30.1,50.9
  Bottom 0.15: v84.3,56.5 92.25,56.5 v92.97,57.22 | v80.05,48.84 30.86,48.84 30.1,49.6 v30.1,50.9
DN
  Top 0.15: D1.4 151.68,51.98 153.98,51.98 154.6,52.6 162.26,52.6 163.16,53.5 163.67,53.5 J2.B7 163.87,53.6 164.58,53.6 164.9,53.92 164.9,54.38 164.78,54.5 163.97,54.5 J2.A7
DP
  Top 0.15: D1.6 152.2,54.4 154.34,54.4 155.85,52.9 162.06,52.9 162.88,53.72 162.93,53.77 | J2.A6 163.77,54.1 163.3,54.1 163.2,54 163.16,54 162.93,53.77 | J2.B6 163.67,55 163.16,55 162.93,54.77 162.93,53.77
EPD_3V3
  Top 0.3: J1.16 J1.15 81.52,15.91 81.52,16.36 81.69,16.52 82.13,16.52 85.46,19.85 EPD_C5.1 86,20.96 86.73,21.68 86.73,26.6 TP17.TP 83.21,27.6 82.6,28.21 | Q2.2 78.62,27.9 C7.1 79.04,27.67 79.58,28.21 82.6,28.21 | 82.6,28.21 82.79,28.21 83.92,29.34 L1.2
EPD_3V3_C  (via drill 0.35)
  Top 0.3: R_CL1.2 72.35,28.24 73.91,29.8 | U2.18 20.98,64.29 20.98,64.61 21.27,64.9 v22,64.9 | TP13.TP 66.54,78.34 46.2,58 44.88,58 | 73.91,29.8 73.08,29.8 73.08,29.89 72.92,30.06 70.84,30.06 70.25,30.65 70.25,33.25 45.55,57.95 44.92,57.95 44.88,58 | Q2.1 74,29.8 73.91,29.8 | 44.88,58 27.5,58 25.4,60.1 25.4,64.79 24.71,65.48 23.82,65.48 v23.72,65.58
  Bottom 0.3: v22,64.9 22.58,65.48 23.61,65.48 v23.72,65.58
EPD_BUSY  (via drill 0.35)
  Top 0.15: J1.9 84.3,15.99 84.3,16.32 83.98,16.65 v83.98,16.78 | U2.26 10.9,63.13 10.9,62.92 11.02,62.8 16.98,62.8 17.87,61.9 20.58,61.9 26.48,56 v26.5,56
  Top 0.152: U2.26 9.66,64.37 9.66,65.9 TP9.TP
  Bottom 0.15: v83.98,16.78 83.51,17.25 78.05,17.25 76.7,18.6 76.7,19.1 74.4,21.4 70.6,21.4 68.4,23.6 68.4,30 66.3,32.1 48.21,32.1 35.16,45.15 27.44,45.15 26.61,45.97 26.61,46.35 29.65,49.39 29.65,52.85 v26.5,56
EPD_CS  (via drill 0.35)
  Top 0.15: U2.11 21.06,45.63 21.06,45.1 v20.88,44.92 | v33,29.8 33.95,28.85 TP10.TP 39.57,28.68 42.95,25.3 60.62,25.3 62.8,27.48 63.8,27.48 65.78,25.5 67.16,25.5 69.79,28.13 R9.1 73.59,25.13 73.68,25.13 D6.2 73.88,22.86 76.53,22.86 77.25,22.15 77.25,19.14 78,18.4 v78,18.1 | J1.12 83.1,15.69 83.1,15.19 83.84,14.45 84.85,14.45 v84.95,14.35
  Bottom 0.15: v33,29.8 33,32.8 v20.88,44.92 | v84.95,14.35 85,14.3 85.2,14.5 85.2,16.7 83.8,18.1 v78,18.1
EPD_DC  (via drill 0.35)
  Top 0.15: TP11.TP 61.72,24.7 v60.6,24.7 62.3,24.7 70.19,16.81 v75.34,16.81 v75.35,16.8 | v83.2,16.8 83.45,16.55 J1.11 | U2.5 13.44,45.63 13.44,45.42 13.9,44.95 v13.9,44.93
  Bottom 0.15: v60.6,24.7 56.44,24.7 54.09,27.05 53.71,27.05 51.36,24.7 34.13,24.7 v13.9,44.93 | v83.2,16.8 | v83.2,16.8 v75.35,16.8
EPD_RST  (via drill 0.35)
  Top 0.15: v39.5,25.3 TP12.TP 56.57,8.22 67,8.22 70.73,11.95 83.4,11.95 v83.7,11.65 | J1.10 83.8,15.69 83.8,15.13 v83.91,15.02 | U2.21 17.25,63.13 17.25,62.92 17.92,62.24 20.65,62.24 23.94,58.96 24.18,58.96 26.95,56.19 26.95,55.81 26.69,55.55 26.29,55.55 v24.62,57.22
  Bottom 0.15: v39.5,25.3 39.5,40.41 35.04,44.87 27.32,44.87 26.33,45.86 26.33,46.47 29.37,49.5 29.37,50.63 24.62,55.38 v24.62,57.22 | v83.7,11.65 84.18,12.13 84.18,14.76 v83.91,15.02
FLASH_CS  (via drill 0.35)
  Top 0.15: v26.6,43.8 26.95,43.8 R5.1 31.6,48.35 D9.2 34,50.75 v34,52.43 | U1.1 31.91,56.91 v31.61,56.6 | v21.82,45.05 21.71,45.16 U2.12
  Bottom 0.15: v26.6,43.8 25.4,45 25.4,45.05 v21.82,45.05 | v31.61,56.6 31.55,56.55 31.55,54.88 v34,52.43
GDR  (via drill 0.35)
  Top 0.15: Q3.1 66.06,15.91 66.79,15.18 67.45,15.18 67.86,15.59 R4.1 69.3,15.59 70.46,14.44 73.8,14.44 75.11,15.75 75.49,15.75 78.56,12.68 87.88,12.68 v88.3,13.1 | v89.7,17.6 88.54,16.44 88.22,16.44 88.1,16.32 88.1,15.99 J1.2
  Bottom 0.15: v88.3,13.1 88.3,16.2 v89.7,17.6
GND  (via drill 0.35)
  Top 0.15: U2.1 7.74,35.65 TP5.TP | J2.A1 J2.B12 | C5.2 52.4,107.25 RESET_BUTTON.2 | SENSOR2.7 158.64,13.55 158.85,13.55 159,13.4 159,12.8 158.85,12.65 158.66,12.65 SENSOR2.5 | J1.MP2 75.95,14.65 v75.3,15.3 | J1.17 80.3,15.69 80.3,15.36 80.1,15.15 v80.1,14.93 | D10.1 50.83,30.58 50.83,29.18 50.9,29.11 50.9,28.65 51.09,28.65 51.35,28.39 51.35,28.01 51.09,27.75 51.01,27.75 50.15,26.89 50.15,26.72 50.03,26.6 48.97,26.6 48.85,26.72 48.85,27.58 49.2,27.94 49.2,28.81 48.83,29.18 48.83,30.58 D11.1 48.6,32.15 45.9,32.15 D12.1 45,32.05 v44.9,32.15 | D9.1 40.4,40.85 v40.4,35.9 | U1.9 35.9,53.9 34.8,53.9 33.99,53.09 U1.4 | C8.2 v87.46,47.37 | C4_USB.2 147.86,53.15 148.09,52.93 148.42,52.93 D1.2 149.32,52.93 149.54,52.93 151.76,55.15 C5_USB.2 | v130.12,45.18 127.84,45.18 MCP73831.2 | R2_BAT.1 128.36,43.49 v128.48,43.49 | U3.13 85.16,53.89 82.12,50.86 82.12,48.48 v82.45,48.15 | v88.7,23.3 87.72,22.32 EPD_C2.2 | EPD_C5.2 86,22.6 86.2,22.8 v86.2,23.3 | EPD_C10.2 74.45,20.6 v74.4,20.6 | U2.29_5 U2.29_4
  Bottom 0.15: v75.3,15.3 79.7,15.3 80.07,14.93 v80.1,14.93 | v40.4,35.9 44.15,32.15 v44.9,32.15 | 149.67,45.13 149.6,45.2 | v128.48,43.49 128.48,43.54 v130.12,45.18 | v87.46,47.37 87.34,47.49 83.35,47.49 82.69,48.15 v82.45,48.15
  pour Top: 73.46,10.56 73.48,10.58 92.82,10.58 92.84,10.56 92.86,10.54 92.88,10.52 92.88,0.58 169.42,0.58 169.42,66.42 91.48,66.42 91.46,66.44 91.44,66.46 91.42,66.48 91.42,110.42 0.48,110.42 0.48,64.38 6.42,64.38 6.44,64.36 6.46,64.34 6.48,64.32 6.48,45.78 6.46,45.76 6.44,45.74 6.42,45.72 0.48,45.72 0.48,0.58 73.42,0.58 73.42,10.52 73.44,10.54
  pour Bottom: 73.36,10.46 73.38,10.48 92.72,10.48 92.74,10.46 92.76,10.44 92.78,10.42 92.78,0.48 169.32,0.48 169.32,66.32 91.38,66.32 91.36,66.34 91.34,66.36 91.32,66.38 91.32,110.32 0.48,110.32 0.48,64.38 6.42,64.38 6.44,64.36 6.46,64.34 6.48,64.32 6.48,45.78 6.46,45.76 6.44,45.74 6.42,45.72 0.48,45.72 0.48,0.48 73.32,0.48 73.32,10.42 73.34,10.44
GPIO8
  Top 0.15: U2.10 19.79,45.63 19.79,45.42 20.06,45.15 20.06,43.65 R1.2
I2C_PW  (via drill 0.35)
  Top 0.15: R2_PINH.2 160.83,7.14 R1_PINH.2 | SENSOR2.6 157.94,13.45 157.74,13.45 157.58,13.6 157.58,15.11 v157.49,15.2 157.99,14.7 SENSOR2.8 158.5,14.7 159.3,13.9 SENSOR2.2 160.86,13.55 160.65,13.55 160.5,13.4 160.5,8.88 R1_PINH.2 | U2.17 22.33,63.13 22.33,62.72 23.99,61.06 v23.99,60.88 | R1_PINH.2 159.27,5.92 C1.1 C2.1
  Bottom 0.15: v157.49,15.2 153.4,15.2 139.05,29.55 112.15,29.55 109.35,32.35 109.35,51.69 97.04,64 83.5,64 81.7,62.2 31.02,62.2 25.02,68.21 24.18,68.21 23.59,67.62 23.59,66.51 24.17,65.93 24.17,61.05 v23.99,60.88
INT_RTC  (via drill 0.35)
  Top 0.15: TP15.TP 16.6,44.34 16.6,45 16.63,45.03 U2.8 17.25,46.87 17.25,47.08 17.64,47.48 26.04,47.48 29.91,51.35 30.55,51.35 v30.9,51.7 | R1_PINH1.1 89.54,57.02 86.07,53.56 v85.86,53.56 | U3.3 84,49.63 v84,48.26
  Bottom 0.15: v85.86,53.56 84.42,52.11 84.42,51.7 85.12,51 85.7,51 85.91,50.79 85.46,50.34 | v30.9,51.7 82.63,51.7 83.98,50.34 85.46,50.34 | v84,48.26 85.2,49.46 85.2,50.08 85.46,50.34
IO/BOOT  (via drill 0.35)
  Top 0.15: R_BOOT.2 20.5,106.5 v21.1,105.9 | v21.3,109.6 22.15,108.75 BOOT_BUTTON.4 BOOT_BUTTON.3 27.4,108.75 C6.1 | U2.15 23.63,64.37 23.63,64.58 23.51,64.7 23.35,64.7 22.41,65.64 18.25,65.64 v17.52,66.37
  Bottom 0.15: v21.3,109.6 21.1,109.4 v21.1,105.9 21.1,69.8 17.67,66.37 v17.52,66.37
IO/CHANGE  (via drill 0.35)
  Top 0.15: 61.47,107.98 60.91,107.42 R_CHANGE.2 59.78,106.7 v59.7,106.7 | C10.1 65.85,108.65 CHANGE_BUTTON.3 CHANGE_BUTTON.4 | U2.23 14.09,64.55 v14.5,64.96
  Top 0.152: 61.47,107.98 62.24,108.75 CHANGE_BUTTON.4
  Bottom 0.15: v59.7,106.7 20.86,67.86 20.45,67.86 17.51,64.92 14.54,64.92 v14.5,64.96
MISO  (via drill 0.35)
  Top 0.15: U2.27 8.39,64.37 8.39,64.83 8.38,64.84 8.38,67.1 5.14,70.33 5.14,83.74 2.42,86.46 2.42,91.7 4.51,93.8 J4.P7 | R8.1 D12.2 44.25,29.75 43.8,30.2 43.8,32.1 45.67,33.97 45.67,34.9 43.47,37.1 43.47,38.1 44.39,39.02 44.39,48.31 40.99,51.71 v40.99,52.15 | v34.1,56.6 33.13,55.63 U1.2 32.97,55.5 31,55.5 | 10.07,62.47 16.83,62.47 17.8,61.5 20.2,61.5 23.8,57.9 23.8,57.4 25.93,55.27 26,55.27
  Top 0.152: 31,55.5 TP6.TP 27.43,55.5 27.2,55.27 26,55.27 | U2.27 9.63,63.13 9.63,62.92 10.07,62.47
  Bottom 0.15: v34.1,56.6 35.3,57.8 37.85,57.8 41.89,53.76 41.89,53.13 41.17,52.41 41.17,52.34 v40.99,52.15
MOSI  (via drill 0.35)
  Top 0.15: v24.6,67.2 24.6,67.1 24.1,66.6 v21.46,66.6 21.2,66.35 19.19,66.35 17.41,68.13 9.18,68.13 6.12,71.19 6.12,84.14 4.05,86.22 4.05,88.45 J4.P3 | v50.9,28.2 50.55,28.2 R7.1 D11.2 50.3,30.55 50.3,32.2 49.7,32.8 49.47,32.8 TP7.TP 44.67,48.63 41.62,51.67 v41.62,52.23 | J1.14 82.1,15.69 82.1,15.21 82.45,14.86 v82.45,14.65 | v41.61,57.47 41.61,53.81 U1.5 41.03,52.95 v42.45,52.95
  Top 0.152: U2.7 15.56,46.45 v15.56,47.7
  Bottom 0.15: v15.56,47.7 15.61,47.75 16.85,47.75 21.46,52.36 v21.46,66.6 | v50.9,28.2 62.9,28.2 69.2,21.9 69.2,17.4 72.12,14.48 82.28,14.48 v82.45,14.65 | v24.6,67.2 24.6,67.1 25,66.7 25,60.2 26.35,58.85 40.23,58.85 v41.61,57.47 | v41.62,52.23 42.35,52.95 v42.45,52.95
N$1
  Top 0.15: R2-USB1.2 152.23,46.92 152.09,46.92 151.86,47.15 150.92,47.15 148.57,44.81 148.57,40.66 148.45,40.54 146.79,40.54 146.67,40.66 146.67,44.42 153.94,51.7 154.09,51.7 154.65,52.26 162.42,52.26 163.16,53 163.67,53 J2.A5
N$2  (via drill 0.35)
  Top 0.15: v158.3,51.2 155.09,51.2 151.8,47.91 151.8,47.6 152.2,47.2 153.3,47.2 153.5,47 153.5,46.26 152.65,45.41 R2-USB.1 | v159.8,55.6 160.35,56.15 J2.B5
  Bottom 0.15: v159.8,55.6 159.8,52.7 v158.3,51.2
N$3  (via drill 0.35)
  Top 0.15: Q1.2 133.8,36.97 D2.1 131.9,33.81 v131.9,33.3 | IC4.3 121.48,34.28 121.56,34.28 121.68,34.4 121.68,35.16 121.56,35.28 121.48,35.28 IC4.1 | C1_BAT1.1 120.42,33.83 121,33.83 IC4.3 | IC4.3 121.4,33.83 v121.4,32.4
  Bottom 0.15: v121.4,32.4 121.5,32.4 122.4,31.5 130.1,31.5 v131.9,33.3
N$4
  Top 0.15: J1.24 76.95,16.45 74.77,18.63 EPD_C12.1
N$5  (via drill 0.35)
  Top 0.15: v120.6,47.4 120.46,47.26 CHG_LED.C | R1_BAT.2 121.87,44.69 121.87,45.37 v121.78,45.46
  Bottom 0.15: v120.6,47.4 121.46,46.54 121.46,45.77 v121.78,45.46
N$6  (via drill 0.35)
  Top 0.15: R1_BAT.1 120.47,43.8 120.63,43.65 126.93,43.65 v127.3,43.27 | MCP73831.1 127.7,44.73 v128.96,44.73
  Bottom 0.15: v128.96,44.73 127.5,43.27 v127.3,43.27
N$8  (via drill 0.35)
  Top 0.15: v124.8,43 v124.81,42.99 R2_BAT.2 | MCP73831.5 123.86,44.55 v123.72,44.4
  Bottom 0.15: v123.72,44.4 124.8,43.31 v124.8,43
N$9
  Top 0.15: C4.1 92.97,32.72 91.9,32.72
  Top 0.152: 91.9,32.72 91.68,32.5 D3.2 87.75,29 D4.1
N$10
  Top 0.15: J1.22 77.8,15.99 77.8,16.32 76,18.13 EPD_C10.1
N$12
  Top 0.15: J1.20 79.1,15.99 79.1,16.58 78.94,16.73 78.94,16.74 78.93,16.75 78.94,16.97 78.94,17.2 80,18.26 EPD_C8.1
N$13
  Top 0.15: J1.19 79.6,15.99 79.6,16.32 82,18.73 EPD_C7.1
N$14
  Top 0.15: J1.18 80.1,15.99 80.1,16.32 84,20.23 EPD_C6.1
N$16
  Top 0.15: C_DELAY.1 52,101.35 IC1.5
N$17  (via drill 0.35)
  Top 0.15: D7.1 92.43,63.07 v93,62.5 | v94.05,52.22 94.05,51.22 R1_CAPACITOR.1
  Bottom 0.15: v93,62.5 94.05,61.45 v94.05,52.22
N$22
  Top 0.15: EPD_C2.1 86.45,19.61 J1.5
N$23
  Top 0.15: EPD_C1.1 86.95,18.71 J1.4
PREVGH  (via drill 0.35)
  Top 0.3: J1.21 78.52,15.91 78.52,20.25 EPD_C9.1 79.11,22.04 79.11,22.61 79.28,22.78 80.08,22.78 v80.5,23.2 | D5.1 75.96,36.86 74.9,35.8 v74.9,31.9
  Bottom 0.3: v74.9,31.9 80.5,26.3 v80.5,23.2
PREVGL
  Top 0.3: EPD_C11.1 71.16,18.61 71.77,18 74.9,18 76.52,16.38 76.52,15.32 76.69,15.16 77.22,15.16 77.45,15.4 | 77.45,15.4 79.81,13.04 85.74,13.04 87.86,15.16 88.72,15.16 91.9,18.35 91.9,27.85 D4.2 | 77.45,15.4 J1.23
RESE  (via drill 0.35)
  Top 0.15: Q3.2 66.88,15.91 66.15,16.64 65.49,16.64 63.36,14.51 63.36,8.54 63.4,8.5 66.19,8.5 R3.1 69.92,12.23 v85.87,12.23 | J1.3 87.6,15.99 87.6,16.32 88,16.73 v88,17.8
  Bottom 0.15: v85.87,12.23 85.93,12.23 87.22,13.52 87.22,15.41 88,16.19 v88,17.8
RESE'
  Top 0.15: R3.2 66.41,11.54 SJ1.2 65.67,13.1 R2.2
RESET  (via drill 0.35)
  Top 0.15: C5.1 52.4,108.75 RESET_BUTTON.3 RESET_BUTTON.4 46.48,107.98 46.47,107.98 45.84,107.35 R_RESET.2 45.1,106.95 45.1,104.25 46.4,102.95 IC1.1 46.85,103.7 v46.4,103.7 | v10.3,47.6 10.3,46.27 U2.3
  Bottom 0.15: v46.4,103.7 21.38,78.68 21.38,69.18 17.4,65.2 15.1,65.2 14.8,65.5 14.4,65.5 13.8,64.9 9.6,64.9 8.99,65.51 8.4,65.51 8.12,65.23 8.12,64.86 10.3,62.68 v10.3,47.6
RTC_RST  (via drill 0.35)
  Top 0.15: U2.16 22.98,63.12 23.72,62.38 v23.72,61.98 | U3.4 84.38,50.52 84.38,50.81 84.15,51.04 v84.15,51.15
  Bottom 0.15: v84.15,51.15 83.18,52.12 44.12,52.12 37.87,58.37 24.84,58.37 23.54,59.67 23.54,61.06 23.72,61.24 v23.72,61.98
RX
  Top 0.152: TP2.TP 14.31,65.9 12.82,64.41 U2.24
SCK  (via drill 0.35)
  Top 0.15: v14.09,47.65 14.29,47.65 19.14,52.5 29.55,52.5 v30.3,53.25 | v53.9,26.6 53.55,26.25 52.4,26.25 R6.1 51.5,27.77 51.63,27.9 51.63,28.5 51.5,28.63 D10.2 51.5,28.65 53.8,26.35 60.67,26.35 62.51,28.19 64.09,28.19 65.89,26.39 66.69,26.39 69.9,29.6 69.9,33.1 45.4,57.6 42.6,57.6 41.9,56.9 41.9,54.6 43.1,53.4 43.1,52.49 42.9,52.29 42.48,52.29 42.08,52.68 41.42,52.68 41.42,52.67 40.37,52.67 40.22,52.82 40.22,53.37 40.37,53.52 40.52,53.52 40.85,53.85 40.85,54.32 U1.6 40.1,53.57 v39.9,53.57 | v55.6,18.18 56.6,17.18 TP8.TP 58.9,15.08 62.78,15.08 v62.8,15.1 | v83.4,14.2 82.91,14.69 82.91,14.84 82.45,15.3 J1.13 | v8.83,65.03 8.83,65.06 8.67,65.22 8.67,67.2 5.42,70.45 5.42,83.85 2.7,86.58 2.7,89.79 4.51,91.6 J4.P5
  Top 0.152: U2.6 v14.09,47.65
  Bottom 0.15: v14.09,47.65 15.7,49.26 15.7,61.31 21,66.61 21,66.79 21.06,66.85 21.06,67.58 20.69,67.58 20.02,66.91 20.02,66.86 17.67,64.51 9.38,64.51 8.86,65.03 v8.83,65.03 | v53.9,26.6 52,24.7 52,21.78 v55.6,18.18 | v62.8,15.1 63.7,14.2 v83.4,14.2 | v39.9,53.57 39.63,53.57 38.04,51.98 33.75,51.98 32.47,53.25 v30.3,53.25
SCL  (via drill 0.35)
  Top 0.15: R2_PINH.1 161.21,8.02 SENSOR2.4 161.6,11.91 v161.6,11.2 | v163,21.5 164.19,21.5 J3.4 165.62,20.3 165.88,20.3 166.28,19.91 166.28,17.3 166,17.02 165.63,17.02 162.35,13.74 v162.35,13.15 | U2.20 18.52,63.13 18.52,62.92 18.91,62.52 20.97,62.52 24.26,59.23 24.62,59.23 v25.02,58.83 | v80.55,59.05 U3.16 82.12,59.83 82.12,62.31 84.19,64.38 94.93,64.38 109.89,49.42 137.49,49.42 139.88,47.02 139.92,47.02 140.3,46.64 140.3,46.3 139.8,45.8 139,45.8 v138.8,46 138.8,46.9 138.09,47.61 136.26,47.61 U4.7
  Bottom 0.15: v162.35,13.15 162.35,11.95 v161.6,11.2 | v138.8,46 163,21.8 v163,21.5 | v80.55,59.05 79.9,59.7 32.74,59.7 24.79,67.65 24.41,67.65 24.15,67.39 24.15,66.86 24.72,66.28 24.72,60.09 25.02,59.78 v25.02,58.83
SDA  (via drill 0.35)
  Top 0.15: 163,4.7 161,4.7 160.8,4.9 160.8,5.55 R1_PINH.1 | 163,7.9 162.05,8.85 162.05,12.46 161.76,12.75 161.56,12.75 SENSOR2.3 161.56,13.45 161.76,13.45 161.92,13.6 161.92,13.7 165.51,17.3 165.88,17.3 166,17.42 166,19.18 165.88,19.3 165.62,19.3 J3.3 164.63,20.07 163.27,20.07 162.55,20.79 162.55,21.69 162.81,21.95 163.35,21.95 v163.42,22.02 | U3.15 82.72,59.16 v82.72,60.85 82.72,62.52 84.3,64.1 94.82,64.1 109.77,49.15 137.25,49.15 138.3,48.1 | U4.8 138.25,48.05 138.3,48.1 | U2.19 19.79,63.13 19.79,62.92 19.91,62.8 21.37,62.8 24.18,59.99 v24.25,59.99 | v139.68,46.58 139.68,46.72 138.3,48.1
  Top 0.152: 163,4.7 163.2,4.9 163.2,7.7 163,7.9
  Bottom 0.15: v163.42,22.02 163.4,22.04 163.4,22.87 v139.68,46.58 | v82.72,60.85 31.98,60.85 24.9,67.93 24.3,67.93 23.87,67.5 23.87,66.75 24.45,66.17 24.45,60.19 v24.25,59.99
SRC  (via drill 0.35)
  Top 0.15: Q3.3 65.37,16.91 62.5,14.04 62.5,10.8 v62.4,10.7 | v78.42,36.09 78.45,36.07 78.45,32.7 L1.1 | v94.08,31.23 94.08,33.73 C4.2 93.38,36.86 D5.2 83.39,38.31 82.8,38.9 v82.8,39.2
  Bottom 0.15: v94.08,31.23 92.7,29.85 92.7,12.9 90.98,11.18 70.88,11.18 68.7,9 64.1,9 v62.4,10.7 | v78.42,36.09 78.42,38.19 79.43,39.2 v82.8,39.2
SS_SD  (via drill 0.35)
  Top 0.15: D8.2 14.8,99.85 R10.1 9.85,98.7 9.85,90.9 8.95,90 6.1,90 5.95,89.85 5.95,88.97 5.4,88.41 J4.P2 5.95,87.75 5.95,86.77 5.8,86.61 5.8,85.3 6.7,84.4 6.81,84.4 6.81,71.12 9.52,68.41 17.52,68.41 18.8,67.12 20.23,67.12 v20.55,66.8 | v11.6,47.6 11.6,46.3 U2.4
  Bottom 0.15: v11.6,47.6 11.6,57.8 20.55,66.75 v20.55,66.8
TX
  Top 0.152: U2.25 11.55,64.84 TP1.TP
USB_D+  (via drill 0.35)
  Top 0.15: U2.14 26.35,46.25 28.65,48.55 v29.5,48.55 | D1.1 148.87,53.53 147.8,54.6 109.2,54.6 98.5,65.3 76.28,65.3 v59.37,48.39
  Bottom 0.15: v59.37,48.39 29.66,48.39 v29.5,48.55
USB_D-  (via drill 0.35)
  Top 0.15: U2.13 23.6,45.63 23.6,45.42 23.72,45.3 24.78,45.3 25.09,45.6 26.5,45.6 v27.06,46.16 | v108.9,51.5 108.9,50.8 110,49.7 137.6,49.7 140,47.3 141.25,47.3 145.85,51.9 145.85,52.28 146.15,52.58 147.48,52.58 148.09,51.98 148.42,51.98 D1.3
  Bottom 0.15: v108.9,51.5 103.56,46.16 v27.06,46.16
VBAT
  Top 0.3: Q1.3 133.15,41.81 TP3.TP 133.15,44.02 C2_BAT.1 | U4.2 U4.3 134.11,47.16 131.11,47.16 C2_BAT.1 | C2_BAT.1 127.68,46.61 MCP73831.3
VBUS  (via drill 0.35)
  Top 0.3: C5_USB.1 152.07,52.47 D1.5 150.91,52.5 150.37,51.97 150.37,51.88 149.47,50.97 | Q1.1 132.06,39.41 133.69,41.04 135.53,41.04 146.53,52.03 C4_USB.1 | Q1.1 131.27,38.78 D2.2 | R1_PWRUSB.2 112.46,38.36 v113.2,39.1 | v114.1,40 114.29,40.19 TP14.TP 114.29,42.95 C1_BAT.1 117.15,45.8 121.28,45.8 CHG_LED.A 124.89,46.48 MCP73831.4 124.92,45.88 126.81,44 128.24,44 128.26,44.02 130.24,44.02 131.9,42.37 Q1.1 | PFMF.050.1.2 150.95,42.54 148.6,40.19 146.64,40.19 146.32,40.51 146.32,44.57 149.22,47.48 149.3,47.55 151.4,49.65 151.4,50.3 150.73,50.97 149.47,50.97 | C4_USB.1 146.98,52.03 147.16,51.85 | 149.47,50.97 149.3,50.97 148.03,50.97 147.16,51.85 | 147.16,51.85 C4_USB.1
  Bottom 0.3: v114.1,40 v113.2,39.1
VRTC  (via drill 0.35)
  Top 0.3: C10_SUPERCAP.2 94.78,50.65 R1_CAPACITOR.2 91.51,49.02 C8.1 89.13,48.1 85.5,48.1 v84.25,46.84 | U3.14 83.19,58.36 83.19,57.96 79.4,54.17 79.4,47.9 80.5,46.8 v81.3,46.8
  Bottom 0.3: v81.3,46.8 81.34,46.84 v84.25,46.84
VUSB
  Top 0.3: 163.76,51.91 J2.A4 J2.B9 | J2.A9 J2.B4 163.9,56.58 164.81,56.58 165.25,56.14 165.25,52.96 164.2,51.91 163.76,51.91 | PFMF.050.1.1 147.62,44.35 155.18,51.91 163.76,51.91
(copper drawn outside any net)
  shapes: Top area x14

## Text on the board
tPlace: GND | EPD_3V3_C | EPD_BUSY | TX | RX | MISO | VBUS | VBAT | INT_RTC | MOSI | GND | EPD_CS | EPD_3V3 | 3V3 | EPD_DC | SCK | EPD_RST